# Altium PCB H-bridge.PcbDoc
Units mm, origin at the board's own origin, x right, y up, seen from the top; angles counter-clockwise.
Board outline 157.56 x 101.6 mm, 2 copper layers (Top Layer, Bottom Layer), stack 0.428 mm thick; 69 components, 61 nets, 204 pads, 38 vias.
Unrouted connection lines stored in the file: 12.
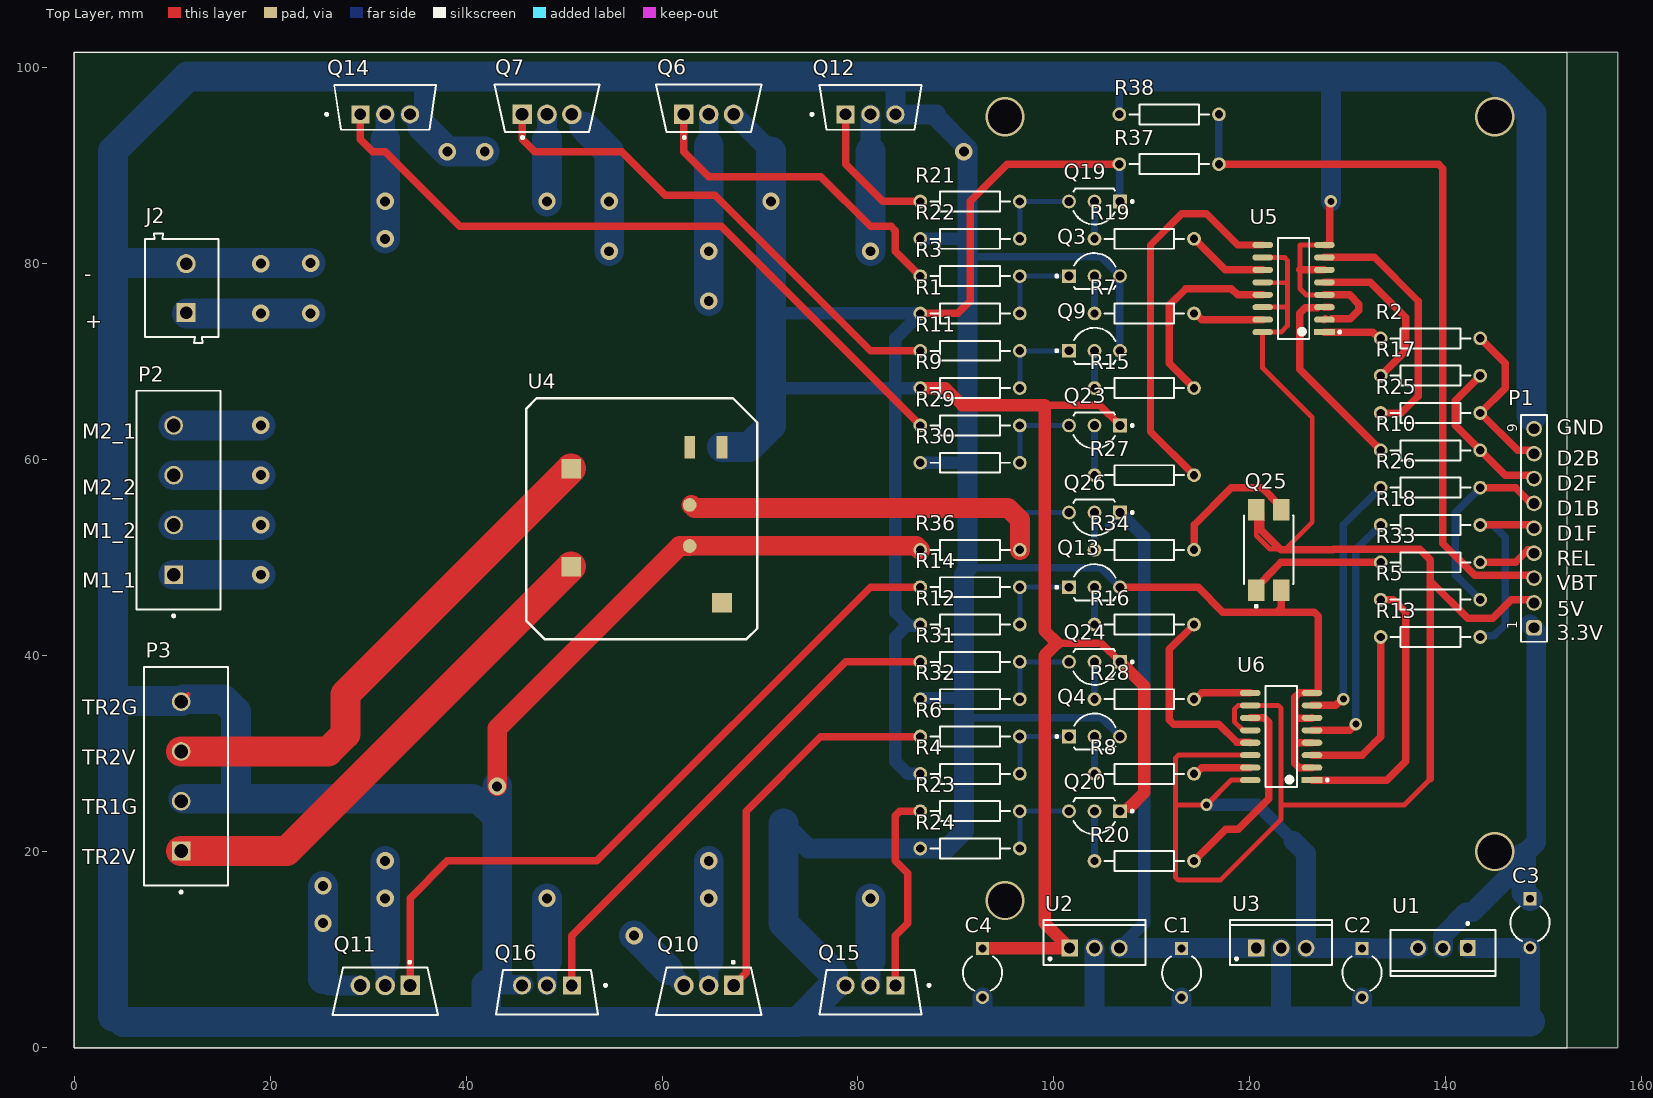
[diagram p0: Top Layer view]
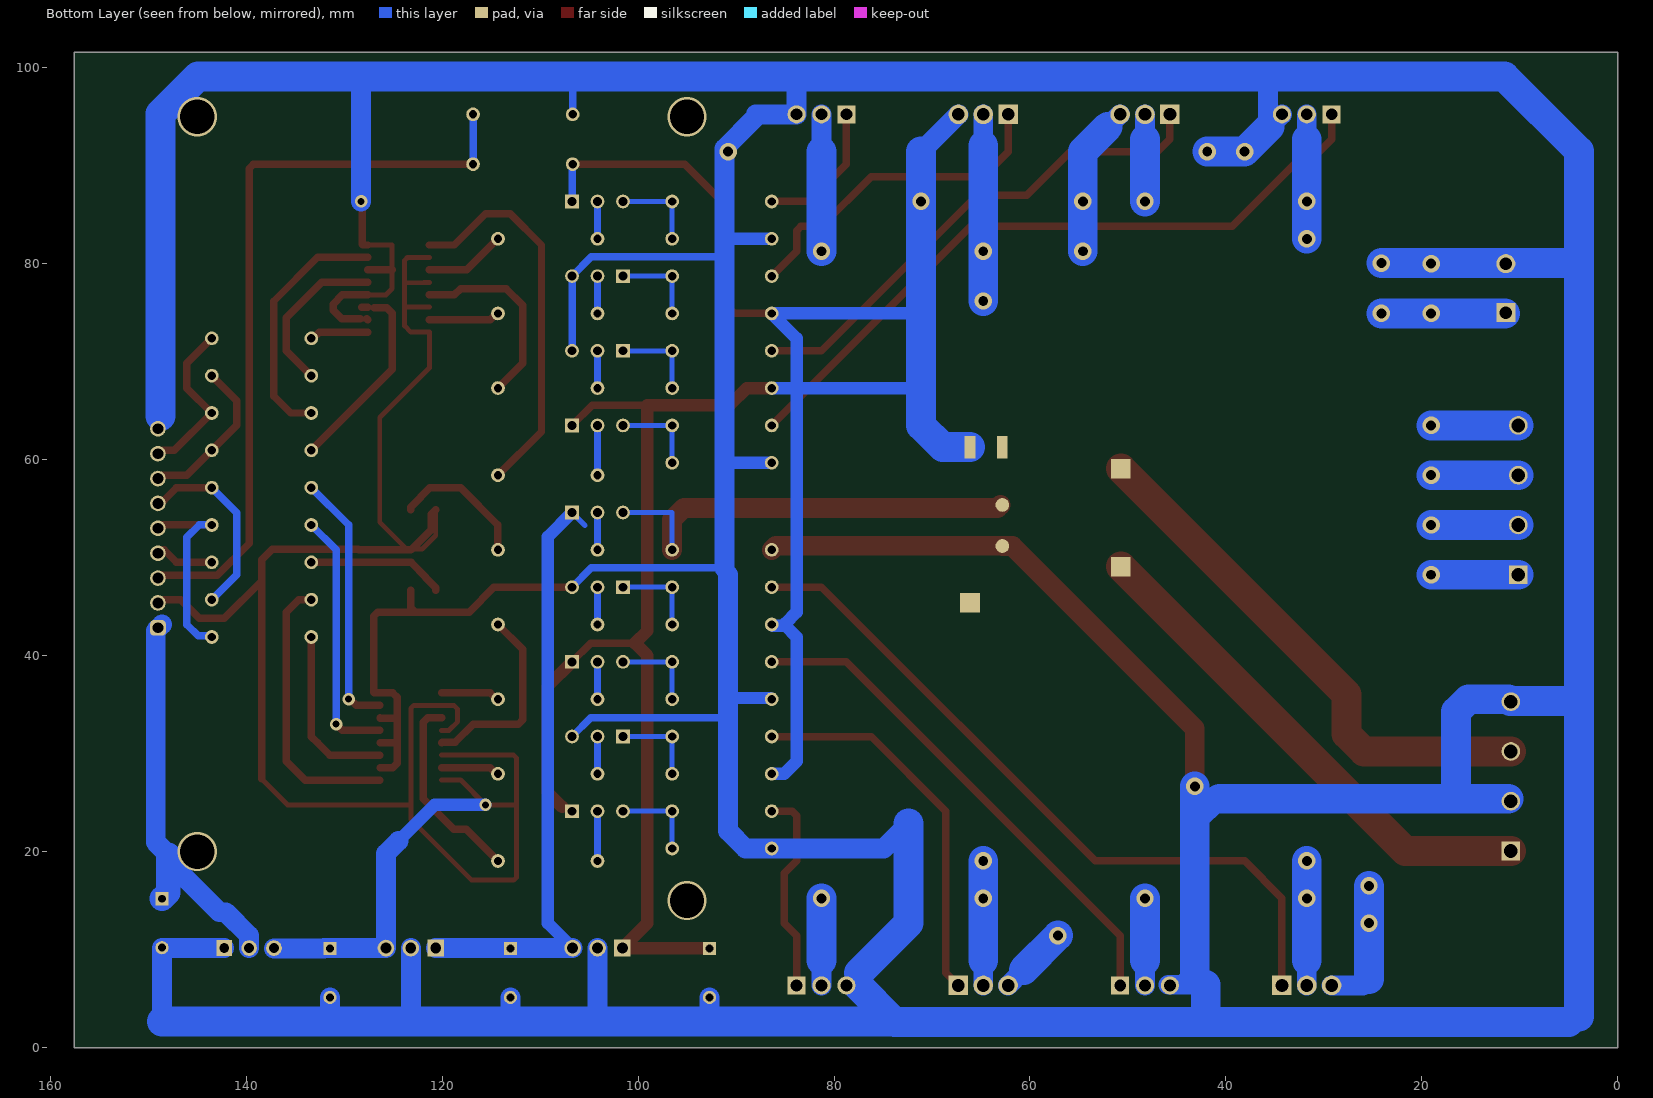
[diagram p1: Bottom Layer view, seen from below]

## Layer stack, top to bottom
Top Solder: solder mask 0.0254, SM-001, Dk 4
Top Layer: signal copper 0.105
Dielectric 1: prepreg 0.2184, PP-023, Dk 4.5
Bottom Layer: signal copper 0.105
Bottom Solder: solder mask 0.0254, SM-001, Dk 4

## Board outline
-0.001,-0.001 157.556,-0.001 157.556,101.599 -0.001,101.599

## Design rules (kind name [scope] priority, off if disabled: settings)
Clearance [All] p1: gap=0.254 ignorepadtopadclearanceinfootprint=FALSE except(0: Arc-Hole Track-Hole SMDPad-Hole THPad-Hole Via-Hole Fill-Hole Poly-Hole Region-Hole Text-Hole)
PolygonConnect [All] p1: connectstyle=Relief reliefconductorwidth=0.254 reliefentries=4 polygonreliefangle="90 Angle" airgapwidth=0.254
RoutingVias [All] p1: holewidth=0.711 width=1.27 viastyle="Through Hole" minholewidth=0.711 minwidth=1.27 maxholewidth=0.711 maxwidth=1.27
SolderMaskExpansion [All] p1: expansion=0.102 istentingtop=FALSE
Width [All] p1: maxlimit=3.048 minlimit=0.254 preferedwidth=0.508 minimp=50.000000 maximp=50.000000 favimp=50.000000
30 further rules are at their usual default settings.

## Components (designator, comment, footprint, x,y, rotation, side; value= is the part's Value field where it differs from the comment)
C1 "Cap2" CAPR5-4X5 113.029,7.619 r270 top value=100mF
C2 "Cap2" CAPR5-4X5 131.444,7.619 r270 top value=100mF
C3 "Cap2" CAPR5-4X5 148.589,12.699 r270 top value=100mF
C4 "Cap2" CAPR5-4X5 92.709,7.619 r270 top value=100mF
J2 "691102710002" 691102710002 10.979,77.509 r90 top
P1 "61300911121" 61300911121 149,53 r90 top
P2 "1755752" PHOE-1755752-4_V 10.159,55.879 r90 top
P3 "1755752" PHOE-1755752-4_V 10.921,27.685 r90 top
Q3 "BC337-40ZL1G" ONSC-TO-92-3-29-11_AM_BL 104.139,78.739 r0 top
Q4 "BC337-40ZL1G" ONSC-TO-92-3-29-11_AM_BL 104.139,31.749 r0 top
Q6 "IRF4905PBF" FP-PG-TO220-3-MFG#1 64.769,95.859 r90 top
Q7 "IRF4905PBF" FP-PG-TO220-3-MFG#1 48.259,95.859 r90 top
Q9 "BC337-40ZL1G" ONSC-TO-92-3-29-11_AM_BL 104.139,71.119 r0 top
Q10 "IRF4905PBF" FP-PG-TO220-3-MFG#1 64.769,5.739 r270 top
Q11 "IRF4905PBF" FP-PG-TO220-3-MFG#1 31.749,5.739 r270 top
Q12 "IRF2805PBF" FP-PG-TO220-3-MFG#2 81.279,95.954 r90 top
Q13 "BC337-40ZL1G" ONSC-TO-92-3-29-11_AM_BL 104.139,46.989 r0 top
Q14 "IRF2805PBF" FP-PG-TO220-3-MFG#2 31.749,95.954 r90 top
Q15 "IRF2805PBF" FP-PG-TO220-3-MFG#2 81.279,5.644 r270 top
Q16 "IRF2805PBF" FP-PG-TO220-3-MFG#2 48.259,5.644 r270 top
Q19 "BC337-40ZL1G" ONSC-TO-92-3-29-11_AM_BL 104.139,86.359 r180 top
Q20 "BC337-40ZL1G" ONSC-TO-92-3-29-11_AM_BL 104.139,24.129 r180 top
Q23 "BC337-40ZL1G" ONSC-TO-92-3-29-11_AM_BL 104.139,63.499 r180 top
Q24 "BC337-40ZL1G" ONSC-TO-92-3-29-11_AM_BL 104.139,39.369 r180 top
Q25 "PC817XNNIP0F" FP-PC817XNNIP0F-MFG 121.919,50.799 r90 top
Q26 "BC337-40ZL1G" ONSC-TO-92-3-29-11_AM_BL 104.139,54.609 r180 top
R1 "Res2" AXIAL-0.4 91.439,74.929 r180 top value=10K
R2 "Res2" AXIAL-0.4 138.429,72.389 r180 top value=100
R3 "Res2" AXIAL-0.4 91.439,78.739 r0 top value=1K
R4 "Res2" AXIAL-0.4 91.439,27.939 r180 top value=10K
R5 "Res2" AXIAL-0.4 138.429,45.719 r180 top value=100
R6 "Res2" AXIAL-0.4 91.439,31.749 r0 top value=1K
R7 "Res2" AXIAL-0.4 109.219,74.929 r180 top value=1K
R8 "Res2" AXIAL-0.4 109.219,27.939 r180 top value=1K
R9 "Res2" AXIAL-0.4 91.439,67.309 r180 top value=10K
R10 "Res2" AXIAL-0.4 138.429,60.959 r180 top value=100
R11 "Res2" AXIAL-0.4 91.439,71.119 r0 top value=1K
R12 "Res2" AXIAL-0.4 91.439,43.179 r180 top value=10K
R13 "Res2" AXIAL-0.4 138.429,41.909 r180 top value=100
R14 "Res2" AXIAL-0.4 91.439,46.989 r0 top value=1K
R15 "Res2" AXIAL-0.4 109.219,67.309 r180 top value=1K
R16 "Res2" AXIAL-0.4 109.219,43.179 r180 top value=1K
R17 "Res2" AXIAL-0.4 138.429,68.579 r180 top value=100
R18 "Res2" AXIAL-0.4 138.429,53.339 r180 top value=100
R19 "Res2" AXIAL-0.4 109.219,82.549 r180 top value=1K
R20 "Res2" AXIAL-0.4 109.219,19.049 r180 top value=1K
R21 "Res2" AXIAL-0.4 91.439,86.359 r0 top value=1K
R22 "Res2" AXIAL-0.4 91.439,82.549 r180 top value=10K
R23 "Res2" AXIAL-0.4 91.439,24.129 r0 top value=1K
R24 "Res2" AXIAL-0.4 91.439,20.319 r180 top value=10K
R25 "Res2" AXIAL-0.4 138.429,64.769 r180 top value=100
R26 "Res2" AXIAL-0.4 138.429,57.149 r180 top value=100
R27 "Res2" AXIAL-0.4 109.219,58.419 r180 top value=1K
R28 "Res2" AXIAL-0.4 109.219,35.559 r180 top value=1K
R29 "Res2" AXIAL-0.4 91.439,63.499 r0 top value=1K
R30 "Res2" AXIAL-0.4 91.439,59.689 r180 top value=10K
R31 "Res2" AXIAL-0.4 91.439,39.369 r0 top value=1K
R32 "Res2" AXIAL-0.4 91.439,35.559 r180 top value=10K
R33 "Res2" AXIAL-0.4 138.429,49.529 r180 top value=100
R34 "Res2" AXIAL-0.4 109.219,50.799 r180 top value=1K
R36 "Res2" AXIAL-0.4 91.439,50.799 r180 top value=10K
R37 "Res2" AXIAL-0.4 111.759,90.169 r180 top value=9K
R38 "Res2" AXIAL-0.4 111.759,95.249 r0 top value=1K
U1 "LM1117T-3.3/NOPB" NDE0003A 139.699,10.159 r180 top
U2 "L7812CV" TO220 104.139,10.159 r0 top
U3 "L7805CV" TO220 123.189,10.159 r0 top
U4 "dg19-2021-35-1012-11" DG19-2021-35-1012-11 58.419,53.339 r270 top
U5 "PS2801C-4-F3-A" FP-PS2801C-4-F3-A-IPC_A 124.459,77.469 r180 top
U6 "PS2801C-4-F3-A" FP-PS2801C-4-F3-A-IPC_A 123.189,31.749 r180 top

## Footprints (in the part's own frame and the unit in brackets; to place one, negate y for a bottom-side part, rotate by r counter-clockwise, add the part's x,y. Pads: shape width x height; smd on the part's side, far side on the other; paste and mask are expansions set on the pad)
61300911121 [mm] "Pin Header, pitch 2.54 mm, THT, Vertical, single row, 9p"
  rrect50% 1.6x1.6 hole 1.1: 1(-10.16,0)
  round 1.6 hole 1.1: 2(-7.62,0) 3(-5.08,0) 4(-2.54,0) 5(0,0) 6(2.54,0) 7(5.08,0) 8(7.62,0) 9(10.16,0)
  silkscreen extent -11.58,-1.34 11.58,1.34, body extent -11.43,-1.27 11.43,1.27, height 8.57
691102710002 [mm] "5,00mm - modular - blue - Horizontal entry with pressure clamp - 9,9 mm height - 02p"
  rect 1.95x1.95 hole 1.3: 1(-2.5,-0.45)
  round 1.95 hole 1.3: 2(2.5,-0.45)
  silkscreen extent -5.6,-3.75 5.6,3.75, body extent -5.6,-3.75 5.6,3.75, height 9.96
AXIAL-0.4 [mm] "Axial Device, Thru-Hole; 2 Leads; 0.4 in Pin Spacing"
  round 1.4 hole 0.85: 1(-5.08,0) 2(5.08,0)
  silkscreen extent -4.06,-1.02 4.06,1.02
CAPR5-4X5 [mm] "Capacitor; 2 Leads"
  rect 1.35x1.35 hole 0.8: 1(-2.5,0)
  round 1.35 hole 0.8: 2(2.5,0)
  silkscreen extent -1.69,-2 1.82,2
DG19-2021-35-1012-11 [mm]
  rect 2x2 all layers, no hole: 1(4.25,-7.7) 2(-5.75,-7.7) 7(7.95,7.7)
  rect 2.3x1.1 all layers, no hole: 3(-7.95,4.4) 4(-7.95,7.7)
  round 1.4 all layers, no hole: 5(-2.05,4.4) 6(2.15,4.4)
  silkscreen extent -12.95,-12.3 11.65,11.3
FP-PC817XNNIP0F-MFG [mm]
  rect 2.2x1.7 smd paste+0 mask+0: 1(-4.1,1.27) 2(-4.1,-1.27) 3(4.1,-1.27) 4(4.1,1.27)
  silkscreen extent -5.87,-2.54 3.5,2.54, body extent -5.3,-2.64 5.3,2.64, height 0.25
FP-PG-TO220-3-MFG#1 [mm]
  rect 2x2 hole 1.3 paste-2539.97 mask+0: 1(-0.61,2.54)
  round 2 hole 1.3 paste-2539.97 mask+0: 2(-0.61,0) 3(-0.61,-2.54)
  silkscreen extent -3.1,-5.37 2.41,5.37, body extent -2.51,-5.48 2.51,5.48, height 0.25
FP-PG-TO220-3-MFG#2 [mm]
  rect 1.85x1.85 hole 1.2 paste-2539.97 mask+0: 1(-0.705,2.54)
  round 1.85 hole 1.2 paste-2539.97 mask+0: 2(-0.705,0) 3(-0.705,-2.54)
  silkscreen extent -2.27,-5.2 2.27,6.1, body extent -2.37,-5.55 2.37,5.55, height 0.25
FP-PS2801C-4-F3-A-IPC_A [mm]
  rect 2.103x0.616 smd paste+0 mask+0: 1(-3.15,4.445)
  rrect100% 2.103x0.616 smd paste+0 mask+0: 2(-3.15,3.175) 3(-3.15,1.905) 4(-3.15,0.635) 5(-3.15,-0.635) 6(-3.15,-1.905) 7(-3.15,-3.175) 8(-3.15,-4.445) 9(3.15,-4.445) 10(3.15,-3.175) 11(3.15,-1.905) 12(3.15,-0.635) 13(3.15,0.635) 14(3.15,1.905) 15(3.15,3.175) 16(3.15,4.445)
  silkscreen extent -4.83,-5.15 1.6,5.15, body extent -4.7,-5.65 4.7,5.65, height 0.25
NDE0003A [mm] "FM, 3-Leads, Body 10.7x4.7mm, Pitch 2.54mm"
  rect 1.6x1.6 hole 1: 1(-2.54,0)
  round 1.6 hole 1: 2(0,0) 3(2.54,0)
  silkscreen extent -5.35,-2.62 5.35,2.85, body extent -5.4,-1.9 5.4,2.9, height 19.4
ONSC-TO-92-3-29-11_AM_BL [mm] "TO, 3-Leads, Body Dia 4.7mm, Pitch 2.6mm"
  rect 1.4x1.4 hole 0.9: 1(-2.6,0)
  round 1.4 hole 0.9: 2(0,0) 3(2.6,0)
  silkscreen extent -3.97,-1.34 2.13,2.35, body extent -2.84,-1.34 2.84,2.35, height 5.33
PHOE-1755752-4_V [mm] "TH, 4-Leads, Body 21.32x8.6mm, Pitch 5.08mm"
  rect 1.9x1.9 hole 1.4: 1(-7.62,0)
  round 1.9 hole 1.4: 2(-2.54,0) 3(2.54,0) 4(7.62,0)
  silkscreen extent -11.93,-4.8 11.16,3.8, body extent -11.16,-4.8 11.16,3.8, height 12
TO220 [mm] "TO, Thru-Hole, Vertical, Heatsink Mounted; 3 In-Line Leads; Pitch 2.54 mm"
  rect 1.7x1.7 hole 1.1: 1(-2.54,0)
  round 1.7 hole 1.1: 2(0,0) 3(2.54,0)
  silkscreen extent -5.2,-1.75 5.2,2.85, body extent -5.25,-1.8 5.25,2.9, height 19.7

## Part data
C1 C2 C3 C4: "Capacitor", PackageDescription="Capacitor; 2 Leads", PackageReference=CAPR5-4X5, Published=23-Sep-2002, Publisher="Altium Limited"
J2: library part CMP-1502-03258-1, "Series 102 - 5.00 mm Horizontal Entry Modular with Pressure Clamp WR-TBL, 2 pin", Manufacturer="Wurth Elektronik", Operating Temperature=-40to105degC, Datasheet URL=http://katalog.we-online.de/em/datasheet/6911027100xx.pdf, Manufacturer URL=http://www.we-online.de, Mounting Technology=THT, Package Reference=691102710002, Packaging=Box, Part Number=691102710002, Pin Number=2, Pitch=5.00mm, Publisher=WurthElektronik
P1: library part CMP-1502-01080-2, Color=Black, Contact Resistance=20mΩ, Current Rating=3A, Operating Supply Voltage=250V, Connector Type="Male Pin", Contact Material=Copper, Contact Mating Length=5.9944mm, Contact Plating=Gold, Gender=Male, Lead Pitch=2.54mm, Mount="Through Hole", NexarPartId=32855536, Number of Contacts=9, Number of Pins=9, Number of Positions=9, Number of Rows=1, Orientation=Vertical, Packaging=Bulk, Pitch=2.54mm, REACH SVHC=Unknown, RoHS=Compliant, Termination=Solder
P2 P3: library part CMP-2000-05301-1, "Male Header, Pitch 5.08 mm, 1 x 4 Position, Height 12 mm, Tail Length 3.9 mm, 4-Pin THD, RoHS, Bulk", Colour=Green, Manufacturer="Phoenix Contact", Content=250pc(s), Datasheet URL=https://datasheet.ciiva.com/29210/569389-da-01-en-grundgehaeuse-1755752-250-st-29210608.pdf, Datasheet Version=Nov-13, Industrial packaging=Yes, Manufacturer part No.=1755752, Manufacturer URL=http://www.phoenixcontact.com/, Number of Contacts=4, Pitch=5.08mm, Type=MSTBVA2,5/4-G-5,08
Q3 Q4 Q9 Q13 Q19 Q20 Q23 Q24 Q26: library part CMP-1048-01583-1, "Amplifier Transistor, NPN Silicon, 3-Pin TO-92, Pb-Free, Ammo Box", Manufacturer="On Semiconductor", ComponentLink1Description="Manufacturer URL", ComponentLink1URL=http://www.onsemi.com/, ComponentLink2Description=Datasheet, ComponentLink2URL=http://www.onsemi.com/pub_link/Collateral/BC337-D.PDF, ComponentLink3Description="Package Specification", ComponentLink3URL=http://www.onsemi.com/pub_link/Collateral/MAC97-D.PDF, DatasheetVersion="Rev. 8", IC Continuous (A)=0.8, Mounting Technology="Through Hole", PackageDescription="3-Pin Transistor Outline, Body 4.825 x 3.685 mm, Pitch 1.27 mm", PackageReference=TO-92-3-29-11_AM_BL, PackageVersion="Rev. AM", Packing="Ammo Box", PartNumber=BC337-40ZL1G, Polarity=NPN, RoHS=TRUE
Q6 Q7 Q10 Q11: library part CMP-32901-000200-1, "MOSFET P-CH 55V 74A TO-220AB", Case/Package=TO-220, Continuous Drain Current (ID)=74A, Drain to Source Breakdown Voltage=-55V, Drain to Source Resistance=20mR, Gate to Source Voltage (Vgs)=20V, Input Capacitance=3.4nF, Max Operating Temperature=175°C, Max Power Dissipation=200W, Min Operating Temperature=-55°C, Threshold Voltage=-4V, Drain to Source Voltage (Vdss)=-55V, Element Configuration=Single, Halogen Free="Halogen Free", Height=0.6inch, Lead Free="Lead Free", Length=0.414inch, Max Dual Supply Voltage=-55V, Mount="Through Hole", Number of Pins=3, Packaging=Rail/Tube, Power Dissipation=200W, Rds On Max=20mR, REACH SVHC="No SVHC", RoHS Compliant=Yes, Turn-Off Delay Time=61ns, Turn-On Delay Time=18ns, Width=0.185inch
Q12 Q14 Q15 Q16: library part CMP-32901-001056-1, "MOSFET N-CH 55V 75A TO220AB", Case/Package=TO-220, Continuous Drain Current (ID)=75A, Drain to Source Breakdown Voltage=55V, Drain to Source Resistance=4.7mR, Gate to Source Voltage (Vgs)=20V, Input Capacitance=5.11nF, Max Operating Temperature=175°C, Max Power Dissipation=330W, Min Operating Temperature=-55°C, Threshold Voltage=4V, Drain to Source Voltage (Vdss)=55V, Element Configuration=Single, Halogen Free="Halogen Free", Height=0.65inch, Lead Free="Lead Free", Length=0.42inch, Max Dual Supply Voltage=55V, Mount="Through Hole", Number of Pins=3, Packaging=Rail/Tube, Polarization=N, Power Dissipation=330W, Rds On Max=4.7mR, REACH SVHC="No SVHC", RoHS Compliant=Yes, Series=HEXFET®, Turn-Off Delay Time=68ns, Turn-On Delay Time=14ns, Width=0.19inch
Q25: library part CMP-65434-000005-1, "OPTOISOLATOR 5KV TRANS 4SMD", Case/Package=SMD/SMT, Collector Emitter Saturation Voltage=200mV, Collector Emitter Voltage (VCEO)=80V, Forward Current=50mA, Forward Voltage=1.4V, Isolation Voltage=5kV, Max Operating Temperature=100°C, Max Power Dissipation=200mW, Min Operating Temperature=-30°C, Output Current per Channel=30mA, Package Quantity=2000, Reverse Breakdown Voltage=6V, Collector-emitter Voltage-Max=200mV, Contact Plating=Copper, Fall Time=18000ns, Input Current=50mA, Input Type=DC, Isolation Voltage-Max=5kV, Lead Free="Lead Free", Max Collector Current=50mA, Max Input Current=50mA, Max Output Voltage=80V, Mount="Surface Mount", Number of Channels=1, Number of Elements=1, Number of Pins=4, Output Voltage=80V, Packaging="Tape and Reel", Power Dissipation=200mW, Radiation Hardening=No, Rise Time=18000ns, RoHS Compliant=Yes
R1 R2 R3 R4 R5 R6 R7 R8 R9 R10 R11 R12 R13 R14 R15 R16 R17 R18 R19 R20 R21 R22 R23 R24 R25 R26 R27 R28 R29 R30 R31 R32 R33 R34 R36 R37 R38: "Resistor", LatestRevisionDate=17-Jul-2002, LatestRevisionNote="Re-released for DXP Platform.", PackageDescription="Axial Device, Thru-Hole; 2 Leads; 0.4 in Pin Spacing", PackageReference=AXIAL-0.4, Published=8-Jun-2000, Publisher="Altium Limited"
U1: library part CMP-0062-02494-3, "800mA Low-Dropout Linear Regulator, 3-pin TO-220, Pb-Free", Manufacturer="Texas Instruments", PackageTopMarking=NSUZXYTTE#*LM1117T*3.3, PowerWise=N, ComponentLink1Description="Datasheet URL", ComponentLink1URL=http://www.ti.com/general/docs/lit/getliterature.tsp?genericPartNumber=LM1117-N&fileType=pdf, CompType="LDO IC", PackageDescription="TO-220, Molded, 3 Lead, Straight", PackageReference=NDE0003A, PinCount=3, RoHS=Y
U2: library part CMP-0244-00450-1, "Positive Voltage Regulator, 12V, 3-Pin TO-220", ComponentLink1Description="Manufacturer URL", ComponentLink1URL=http://www.st.com, ComponentLink2Description=Datasheet, ComponentLink2URL=http://www.st.com/internet/com/TECHNICAL_RESOURCES/TECHNICAL_LITERATURE/DATASHEET/CD00000444.pdf, ComponentLink3Description="Package Specification", ComponentLink3URL=http://www.st.com/internet/com/TECHNICAL_RESOURCES/TECHNICAL_LITERATURE/PACKAGE_INFORMATION/CD00004649.pdf, DatasheetVersion=16/11/2011, PackageDescription="TO, Thru-Hole, Vertical, Heatsink Mounted; 3 In-Line Leads; Pitch 2.54 mm", PackageReference=TO220, PackageVersion=ver3.0
U3: library part CMP-0244-00483-1, "Positive Voltage Regulator, 5V, 3-Pin TO-220", ComponentLink1Description="Manufacturer URL", ComponentLink1URL=http://www.st.com, ComponentLink2Description=Datasheet, ComponentLink2URL=http://www.st.com/internet/com/TECHNICAL_RESOURCES/TECHNICAL_LITERATURE/DATASHEET/CD00000444.pdf, ComponentLink3Description="Package Specification", ComponentLink3URL=http://www.st.com/internet/com/TECHNICAL_RESOURCES/TECHNICAL_LITERATURE/PACKAGE_INFORMATION/CD00004649.pdf, DatasheetVersion=16/11/2011, PackageDescription="TO, Thru-Hole, Vertical, Heatsink Mounted; 3 In-Line Leads; Pitch 2.54 mm", PackageReference=TO220, PackageVersion=ver3.0
U5 U6: library part CMP-13576-000002-1, "OPTOISO 2.5KV 4CH TRANS 16-SSOP", Case/Package=SSOP, Collector Emitter Saturation Voltage=300mV, Collector Emitter Voltage (VCEO)=80V, Current Transfer Ratio=400%, Forward Current=30mA, Forward Voltage=1.4V, Input Current=5mA, Isolation Voltage=2.5kV, Max Operating Temperature=100°C, Min Operating Temperature=-55°C, Reverse Breakdown Voltage=6V, Input Type=DC, Lead Free="Lead Free", Mount="Surface Mount", Number of Elements=4, Number of Pins=16, Output Voltage=80V, Packaging="Tape and Reel", Radiation Hardening=No, REACH SVHC="No SVHC", RoHS Compliant=Yes

## Via types
v1: diameter 1.778, hole 1.016, Top Layer to Bottom Layer, 30 vias
v2: diameter 4, hole 3.5, Top Layer to Bottom Layer, 4 vias
v3: diameter 1.27, hole 0.711, Top Layer to Bottom Layer, 4 vias

## Nets (pads, with @x,y where several pads share a name; then routed paths per layer and width w, separated by ;. In a path a pad name is that pad's centre, name@x,y a point inside that pad or via, vN(x,y) a via of type N, cw(c..) or ccw(c..) an arc to the next point about the centre after c; other vN are vias at no path point)
3.3V: C3.1 P1.1 U1.2 | length 41.7
  Bottom Layer w2.032: U1.2 139.699,11.429 142.08,13.81 142.715,13.81 147.954,19.049 ; 147.954,19.684 149.224,20.954 149.224,42.544 P1.1@148.589,43.179
  Bottom Layer w2.54: 147.954,19.684 147.954,19.049 147.954,15.834 C3.1
  other v2: 145,20
5V: C2.1 P1.2 Q25.4 U1.3 U3.3 U5.10 U5.12 U5.14 U5.16 U6.10 U6.12 U6.14 U6.16 | length 215.3
  Top Layer w0.508: U6.16 118.109,27.304 v3(115.569,24.764) 112.394,24.764 ; U6.14 112.692,29.844 112.394,29.547 112.394,24.764 ; U6.12 119.303,32.384 118.414,33.273 118.414,34.543 118.795,34.924 U6.10 122.892,34.924 123.189,34.627 123.189,24.764 ; Q25.4 120.649,52.272 122.046,50.875 123.113,50.875 123.189,50.875 ; U5.14 123.824,75.564 ; U5.12 121.853,78.104 121.853,78.092 123.684,78.051 ; U5.10 123.527,80.644 123.824,80.347 123.824,75.564 ; 123.621,50.875 126.364,53.619 126.364,64.312 121.309,69.367 U5.16 123.189,73.024 123.824,73.659 123.824,75.564 ; 138.429,27.431 135.762,24.764 123.189,24.764 ; 138.429,49.772 138.429,49.783 ; 112.394,24.764 112.394,17.379 112.692,17.082 116.98,17.082 123.189,23.291 123.189,24.764
  Top Layer w0.762: Q25.4 121.118,54.43 121.118,52.87 123.113,50.875 123.189,50.799 128.513,50.799 128.578,50.864 137.337,50.864 138.429,49.772 138.429,47.624 ; 138.429,27.431 138.429,47.624 ; P1.2@148.589,45.719 146.684,45.719 144.779,43.814 142.239,43.814 138.429,47.624
  Bottom Layer w1.27: v3(115.569,24.764) 120.776,24.764 124.459,21.081
  Bottom Layer w2.032: 124.459,21.081 125.729,19.811 U3.3 132.039,10.159 132.079,10.119 U1.3@137.159,10.119
12V: C1.1 Q26.1 U2.3 U3.1 | length 62.4
  Bottom Layer w0.508: 105.409,53.279 Q26.1
  Bottom Layer w1.27: U2.3 109.219,12.699 109.219,52.129 Q26.1
  Bottom Layer w2.032: U2.3 113.029,10.159 U3.1
D1B1: Q10.1 R6.1 | length 39.2
  Top Layer w0.762: Q10.1 68.579,7.619 68.579,24.129 76.199,31.749 R6.1
D1B1C: P1.6 R5.1 R26.1 | length 19.1
  Top Layer w0.762: R26.1 147.111,57.149 148.381,55.879 P1.6@148.589,55.879
  Bottom Layer w0.762: R5.1 140.969,48.259 140.969,54.609 R26.1
D1B2: Q16.1 R31.1 | length 52.2
  Top Layer w0.762: Q16.1 50.799,11.429 78.739,39.369 R31.1
D1F1: Q11.1 R14.1 | length 74.1
  Top Layer w0.762: Q11.1 34.289,15.239 38.099,19.049 53.339,19.049 81.279,46.989 R14.1
D1F1C: P1.5 R13.1 R18.1 | length 20.1
  Top Layer w0.762: R18.1 P1.5@148.589,53.339
  Bottom Layer w0.762: R13.1 143.631,42.031 144.901,42.031 146.049,43.179 146.049,52.069 144.779,53.339 R18.1
D1F2: Q15.1 R23.1 | length 21.1
  Top Layer w0.762: Q15.1 83.819,11.429 85.089,12.699 85.089,17.779 83.819,19.049 83.819,23.683 84.266,24.129 R23.1
D1M1: P2.1 Q11.2 Q16.2 | length 30.5
  Bottom Layer w2.032: Q11.2 31.749,8.889 ; Q16.2 48.259,8.889
  Bottom Layer w3.048: P2.1 v1(19.049,48.259) ; 31.749,8.889 v1(31.749,15.239) v1(31.749,19.049) ; 48.259,8.889 v1(48.259,15.239)
D1M2: P2.2 Q10.2 Q15.2 | length 43.2
  Bottom Layer w0.508: Q10.2 64.769,8.889 v1(64.769,15.239) v1(64.769,19.049)
  Bottom Layer w2.032: Q10.2 64.769,8.889 ; Q15.2 81.279,8.889
  Bottom Layer w3.048: P2.2 v1(19.049,53.339) ; 64.769,8.889 v1(64.769,15.239) v1(64.769,19.049) ; 81.279,8.889 v1(81.279,15.239)
D2B1: Q6.1 R3.1 | length 34.4
  Top Layer w0.762: Q6.1 62.229,91.439 64.769,88.899 76.199,88.899 81.279,83.819 83.373,83.819 83.819,83.373 83.819,81.279 R3.1
D2B1C: P1.8 R2.1 R25.1 | length 16.4
  Top Layer w0.762: R2.1 146.049,69.849 146.049,67.309 R25.1 147.319,60.959 P1.8@148.589,60.959
D2B2: Q14.1 R29.1 | length 71.8
  Top Layer w0.762: Q14.1 29.209,92.709 30.479,91.439 31.749,91.439 39.369,83.819 66.039,83.819 R29.1
D2F1: Q7.1 R11.1 | length 52.1
  Top Layer w0.762: Q7.1 45.719,92.709 46.989,91.439 55.879,91.439 60.324,86.994 65.404,86.994 81.279,71.119 R11.1
D2F1C: P1.7 R10.1 R17.1 | length 15.9
  Top Layer w0.762: R17.1 140.969,66.039 140.969,63.499 R10.1 146.049,58.419 P1.7@148.589,58.419
D2F2: Q12.1 R21.1 | length 14.3
  Top Layer w0.762: Q12.1 78.739,90.169 82.549,86.359 R21.1
D2M1: P2.4 Q7.2 Q14.2 | length 43.2
  Bottom Layer w0.508: v1(31.749,82.549) v1(31.749,86.359) 31.749,92.709 Q14.2
  Bottom Layer w2.032: 31.749,92.709 Q14.2 ; 48.259,92.709 Q7.2
  Bottom Layer w3.048: P2.4 v1(19.049,63.499) ; v1(31.749,82.549) v1(31.749,86.359) 31.749,92.709 ; v1(48.259,86.359) 48.259,92.709
D2M2: P2.3 Q6.2 Q12.2 | length 41.9
  Bottom Layer w2.032: 64.769,92.074 Q6.2 ; 81.279,91.439 Q12.2
  Bottom Layer w3.048: P2.3 v1(19.049,58.419) ; v1(64.769,76.199) v1(64.769,81.279) 64.769,92.074 ; v1(81.279,81.279) 81.279,91.439
Drivers_VCC: C4.1 J2.1 Q6.3 Q7.3 Q10.3 Q11.3 Q19.1 Q20.1 Q23.1 Q24.1 R1.2 R4.2 R9.2 R12.2 R37.2 U2.1 U4.4 | length 320.3
  Top Layer w0.508: Q20.1 107.183,24.573 107.758,24.573
  Top Layer w0.762: R1.2 90.169,74.929 91.439,76.199 91.439,86.359 95.249,90.169 R37.2 ; C4.1 C4.1@92.729,10.139 ; 99.059,65.564 104.675,65.564 Q23.1 ; 100.329,41.274 104.834,41.274 Q24.1 ; U2.1@101.579,10.139 U2.1
  Top Layer w1.27: R9.2 88.899,67.309 90.645,65.564 99.059,65.564 99.059,42.544 100.329,41.274 99.059,40.004 99.059,12.699 U2.1 ; C4.1@92.729,10.139 U2.1@101.579,10.139 ; Q24.1 109.219,36.889 109.219,26.034 107.758,24.573
  Bottom Layer w0.508: Q20.1 Q20.1@106.781,24.129
  Bottom Layer w0.762: 84.967,43.057 84.967,43.301 ; R12.2@86.237,43.057 R12.2 ; R37.2 106.739,90.169 Q19.1
  Bottom Layer w1.27: 71.119,67.309 83.819,67.309 ; 71.119,74.929 R1.2 83.819,72.389 83.819,67.309 ; 84.967,43.301 83.819,44.449 83.819,67.309 ; R12.2@86.237,43.057 84.967,43.057 83.819,41.909 83.819,29.209 85.089,27.939 R4.2 ; R9.2 83.819,67.309
  Bottom Layer w2.032: J2.1 J2.1@11.509,74.929 ; 25.399,6.984 26.034,6.349 Q11.3 ; Q7.3 52.069,93.979 ; 60.959,7.619 Q10.3 ; Q6.3 71.119,91.439
  Bottom Layer w3.048: J2.1@11.509,74.929 v1(19.049,74.929) v1(24.129,74.929) ; 25.399,6.984 v1(25.399,16.509) ; 52.069,93.979 54.609,91.439 v1(54.609,86.359) v1(54.609,81.279) ; v1(57.149,11.429) 60.642,7.937 ; U4.4 68.909,61.289 71.119,63.499 71.119,67.309 71.119,74.929 v1(71.119,86.359) 71.119,91.439
  other v1: 25.399,12.699
GND: C1.2 C2.2 C3.2 C4.2 J2.2 P1.9 P3.2 P3.4 Q3.3 Q4.3 Q9.3 Q12.3 Q13.3 Q14.3 Q15.3 Q16.3 Q25.2 R22.2 R24.2 R30.2 R32.2 R36.2 R38.1 U1.1 U2.2 U3.2 U4.6 U5.2 U5.4 U5.6 U5.8 U6.2 U6.4 U6.6 U6.8 | length 908.6
  Top Layer w0.508: P3.4 11.632,36.016 ; U5.4 125.729,76.834 125.094,77.469 125.094,79.374 125.094,81.914 U5.8 ; U5.2@127.683,74.367 U5.2@128.368,74.367
  Top Layer w0.762: Q13.3 114.711,46.989 117.251,44.449 122.743,44.449 ; Q25.2 123.189,44.896 122.743,44.449 ; 125.094,79.374 U5.6 ; U6.2 125.024,28.574 124.578,29.021 124.578,31.114 ; U6.4 124.578,31.114 ; U6.6 126.308,33.622 124.578,33.622 ; U5.2 U5.2@127.683,74.367 ; U5.4 130.174,76.834 131.129,75.88 131.129,75.249 130.247,74.367 U5.2@128.368,74.367 ; U5.8 128.099,81.914 128.172,81.987 128.172,86.262 v3(128.269,86.359) ; 122.743,44.449 126.553,44.449 126.999,44.003 126.999,36.267 126.926,36.194 U6.8 125.024,36.194 124.578,35.748 124.578,33.622 ; 124.578,31.114 124.578,33.622
  Top Layer w2.032: v1(43.179,26.669) 43.179,32.569 61.799,51.189 U4.6 ; U4.6@62.853,51.223 85.936,51.223 R36.2
  Bottom Layer w0.762: R32.2 R32.2@86.481,35.681 ; 90.804,33.654 104.834,33.654 Q4.3 ; 91.185,48.955 104.773,48.955 Q13.3 ; 91.439,80.705 104.773,80.705 Q3.3 Q9.3 ; R38.1 106.679,99.059 ; v3@128.204,86.359 v3(128.269,86.359)
  Bottom Layer w1.27: R30.2 91.058,59.689 ; R22.2 91.185,82.549 ; R32.2@86.481,35.681 90.804,35.681 91.063,35.681
  Bottom Layer w2.032: P3.2 P3.2@11.175,25.399 ; P3.4 10.983,35.367 P3.4@11.175,35.559 ; 15.319,25.399 16.509,26.59 ; Q14.3 35.559,93.979 ; 35.713,94.041 35.713,98.994 ; 40.639,25.399 43.179,22.859 ; 42.063,6.411 44.388,6.411 ; 43.179,7.619 44.388,6.411 ; Q16.3@45.873,6.411 44.388,6.411 ; 72.389,22.859 74.929,20.319 R24.2 89.026,20.319 90.804,22.097 90.804,33.654 90.804,35.681 90.804,48.259 ; 83.819,99.059 Q12.3 87.987,95.249 ; 87.987,94.974 91.185,91.776 91.185,82.549 91.185,48.955 ; 92.709,2.669 C4.2 ; 104.139,2.669 U2.2 ; 113.029,2.669 C1.2 ; 123.189,3.174 U3.2 ; v3(128.269,86.359) 128.269,99.059 ; 131.444,2.669 C2.2 ; U1.1 148.589,10.159 148.589,2.669
  Bottom Layer w3.048: 3.963,3.174 3.963,91.501 11.583,99.121 144.933,99.121 148.743,95.311 148.743,64.45 ; 4.09,35.367 P3.4@10.983,35.367 ; 4.09,80.071 19.049,80.071 v1(24.129,80.071) ; 5.018,2.601 42.063,2.601 ; P3.2@11.175,25.399 15.319,25.399 40.639,25.399 ; P3.4@11.175,35.559 15.239,35.559 16.509,34.289 16.509,26.59 ; 35.559,93.979 v1(38.099,91.439) v1(41.909,91.439) ; 42.063,6.411 42.063,2.601 ; 43.179,7.619 43.179,22.859 v1(43.179,26.669) ; 72.389,22.859 72.389,12.699 77.469,7.619 ; 77.623,6.411 73.881,2.669 ; 148.589,2.669 131.444,2.669 123.189,2.669 113.029,2.669 104.139,2.669 92.709,2.669 73.881,2.669 ; 42.063,2.601 73.813,2.601 73.881,2.669
  other v1: 19.049,80.009 90.804,91.439
  other v2: 145,95
NetQ3_1: Q3.1 R1.1 R3.2 | length 8.8
  Bottom Layer w0.508: R1.1 R3.2 Q3.1
NetQ3_2: Q3.2 R7.2 | length 3.8
  Bottom Layer w0.762: R7.2 Q3.2
NetQ4_1: Q4.1 R4.1 R6.2 | length 8.8
  Bottom Layer w0.508: R4.1 R6.2 Q4.1
NetQ4_2: Q4.2 R8.2 | length 3.8
  Bottom Layer w0.762: R8.2 Q4.2
NetQ9_1: Q9.1 R9.1 R11.2 | length 8.8
  Bottom Layer w0.508: R9.1 R11.2 Q9.1
NetQ9_2: Q9.2 R15.2 | length 3.8
  Bottom Layer w0.762: R15.2 Q9.2
NetQ13_1: Q13.1 R12.1 R14.2 | length 8.8
  Bottom Layer w0.508: R12.1 R14.2 Q13.1
NetQ13_2: Q13.2 R16.2 | length 3.8
  Bottom Layer w0.762: R16.2 Q13.2
NetQ19_2: Q19.2 R19.2 | length 3.8
  Bottom Layer w0.762: R19.2 Q19.2
NetQ19_3: Q19.3 R21.2 R22.1 | length 8.8
  Bottom Layer w0.508: R22.1 R21.2 Q19.3
NetQ20_2: Q20.2 R20.2 | length 5.1
  Bottom Layer w0.762: R20.2 Q20.2
NetQ20_3: Q20.3 R23.2 R24.1 | length 8.8
  Bottom Layer w0.508: R24.1 R23.2 Q20.3
NetQ23_2: Q23.2 R27.2 | length 5.1
  Bottom Layer w0.762: R27.2 Q23.2
NetQ23_3: Q23.3 R29.2 R30.1 | length 8.8
  Bottom Layer w0.508: R30.1 R29.2 Q23.3
NetQ24_2: Q24.2 R28.2 | length 3.8
  Bottom Layer w0.762: R28.2 Q24.2
NetQ24_3: Q24.3 R31.2 R32.1 | length 8.8
  Bottom Layer w0.508: R32.1 R31.2 Q24.3
NetQ25_1: Q25.1 R33.2 | length 14.1
  Top Layer w0.762: Q25.1 120.649,46.949 121.657,47.957 121.657,48.015 123.171,49.529 R33.2
NetQ25_3: Q25.3 R34.1 | length 14.1
  Top Layer w0.762: R34.1 114.299,53.339 118.109,57.149 121.247,57.149 122.181,56.215 122.181,56.157 123.189,55.149 Q25.3
NetQ26_2: Q26.2 R34.2 | length 3.8
  Bottom Layer w0.762: R34.2 Q26.2
NetQ26_3: Q26.3 R36.1 U4.5 | length 46.2
  Top Layer w0.762: U4.5 U4.5@62.992,55.389
  Top Layer w2.032: U4.5@62.992,55.389 63.304,55.077 95.329,55.077 96.519,53.887 R36.1
  Bottom Layer w0.508: R36.1 96.519,54.609 Q26.3
NetR2_2: R2.2 U5.1 | length 6
  Top Layer w0.762: U5.1 132.542,73.024 133.177,72.389 R2.2
NetR5_2: R5.2 U6.1 | length 28.6
  Top Layer w0.762: U6.1 133.984,27.304 135.889,29.209 135.889,44.449 134.619,45.719 R5.2
NetR7_1: R7.1 U5.15 | length 7.3
  Top Layer w0.762: R7.1 114.472,74.929 115.107,74.294 U5.15
NetR8_1: R8.1 U6.15 | length 6
  Top Layer w0.762: R8.1 114.472,27.939 115.107,28.574 U6.15
NetR10_2: R10.2 U5.3 | length 20.1
  Top Layer w0.762: U5.3@126.939,75.491 126.793,75.491 125.656,75.491 125.094,74.929 125.094,69.214 R10.2 ; U5.3 U5.3@128.207,75.564
NetR13_2: R13.2 U6.3 | length 17.9
  Top Layer w0.762: U6.3 131.444,29.844 132.714,31.114 133.343,31.743 R13.2@133.343,41.837
NetR15_1: R15.1 U5.13 | length 20
  Top Layer w0.762: R15.1 111.759,69.849 111.759,75.753 113.476,77.469 118.109,77.469 118.744,76.834 U5.13
NetR16_1: R16.1 U6.13 | length 20
  Top Layer w0.762: R16.1 111.759,40.639 111.759,33.466 112.206,33.019 116.839,33.019 118.671,31.187 119.966,31.187 U6.13
NetR17_2: R17.2 U5.5 | length 16.7
  Top Layer w0.762: U5.5 132.268,78.104 135.889,74.483 135.889,71.119 R17.2
NetR18_2: R18.2 U6.5 | length 26.1
  Top Layer w0.762: U6.5 130.174,32.384 v3(130.809,33.019)
  Bottom Layer w0.762: v3(130.809,33.019) 130.809,50.799 R18.2
NetR19_1: R19.1 U5.11 | length 8.3
  Top Layer w0.762: R19.1 117.474,79.374 U5.11
NetR20_1: R20.1 U6.11 | length 20.1
  Top Layer w0.762: R20.1 117.535,22.285 118.805,22.285 121.919,25.399 121.919,33.208 121.473,33.654 U6.11
NetR25_2: R25.2 U5.7 | length 25.6
  Top Layer w0.762: U5.7 132.714,80.644 137.159,76.199 137.159,66.486 135.443,64.769 R25.2
NetR26_2: R26.2 U6.7 | length 26.6
  Top Layer w0.762: U6.7 128.767,34.924 129.402,35.559 v3(129.539,35.559)
  Bottom Layer w0.762: v3(129.539,35.559) 129.539,53.339 R26.2
NetR27_1: R27.1 U5.9 | length 39.4
  Top Layer w0.762: R27.1 109.854,62.864 109.854,81.914 113.029,85.089 115.569,85.089 118.744,81.914 U5.9
NetR28_1: R28.1 U6.9 | length 6
  Top Layer w0.762: R28.1 114.472,35.559 115.107,36.194 U6.9
ReleOC: P1.4 R33.1 | length 5.6
  Top Layer w0.762: R33.1 147.111,49.529 148.381,50.799 P1.4@148.589,50.799
TR1_VCC: P3.1 U4.1 | length 51.8
  Top Layer w3.048: P3.1 21.695,20.065 U4.1
TR2_VCC: P3.3 U4.2 | length 54.1
  Top Layer w3.048: P3.3 25.9,30.225 27.685,32.011 27.685,36.055 U4.2
VBAT: P1.3 R37.1 R38.2 | length 76.7
  Top Layer w0.762: R37.1 139.253,90.169 139.699,89.723 139.699,51.451 142.956,48.194 148.524,48.194 P1.3@148.589,48.259
  Bottom Layer w0.762: R37.1 R38.2
pads on no net: U4.3 U4.7
copper on no net:
  other v2: 95,15 95,95

## Silkscreen, mask and mechanical layers (free items; w line width, h text height)
Top Overlay:
  lines w0.1: -0.001,-0.001 -0.001,101.599 152.399,101.599 152.399,-0.001 -0.001,-0.001
  text "-" at 1.016,78.207 h1.52
  text "+" at 1.143,73.406 h1.52
  text "GND" at 151.308,62.535 h1.52
  text "M2_1" at 0.813,62.154 h1.52
  text "D2B" at 151.308,59.36 h1.52
  text "D2F" at 151.308,56.82 h1.52
  text "M2_2" at 0.813,56.439 h1.52
  text "D1B" at 151.308,54.28 h1.52
  text "M1_2" at 0.813,51.994 h1.52
  text "D1F" at 151.308,51.74 h1.52
  text "REL" at 151.308,49.2 h1.52
  text "M1_1" at 0.813,46.914 h1.52
  text "VBT" at 151.308,46.66 h1.52
  text "5V" at 151.345,44.039 h1.52
  text "3.3V" at 151.308,41.58 h1.52
  text "TR2G" at 0.813,33.96 h1.52
  text "TR2V" at 0.813,28.88 h1.52
  text "TR1G" at 0.813,23.8 h1.52
  text "TR2V" at 0.813,18.72 h1.52
Mechanical 1:
  lines w2.032: 31.749,15.239 48.259,15.239 ; 31.749,86.359 48.259,86.359
Wire:
  lines w2.032: 19.049,48.259 31.749,35.559 31.749,19.049 ; 19.049,53.339 30.479,53.339 64.769,19.049 ; 19.049,58.419 21.589,58.419 33.019,69.849 58.419,69.849 64.769,76.199 ; 19.049,63.499 31.749,82.549 ; 19.049,74.929 19.049,69.849 24.129,64.769 24.129,17.779 25.399,16.509 ; 19.049,80.009 19.049,86.359 24.129,91.439 38.099,91.439 ; 24.129,74.929 25.399,76.199 41.909,76.199 46.989,76.199 52.069,81.279 54.609,81.279 ; 24.129,80.009 26.669,80.009 43.179,63.499 43.179,26.669 ; 25.399,12.699 26.669,11.429 57.149,11.429 ; 41.909,91.439 90.804,91.439 ; 43.179,22.859 72.389,22.859 ; 54.609,86.359 71.119,86.359 ; 64.769,15.239 81.279,15.239 ; 64.769,81.279 81.279,81.279

## Text inside footprints (layer, text, board x,y; h text height)
P1: Top Overlay "9" at 147.3,62.78 h1.02 r90; Top Overlay "1" at 147.3,42.72 h1.02 r90